# Altium PCB TIDA-010967_PCB.PcbDoc (part 5 of 5)
Units mil, origin at the board's own origin, x right, y up, seen from the top; angles counter-clockwise.
Board outline 2322.7 x 960 mil, 2 copper layers (Top Layer, Bottom Layer), stack 44.731 mil thick; 178 components, 80 nets, 496 pads, 399 vias.
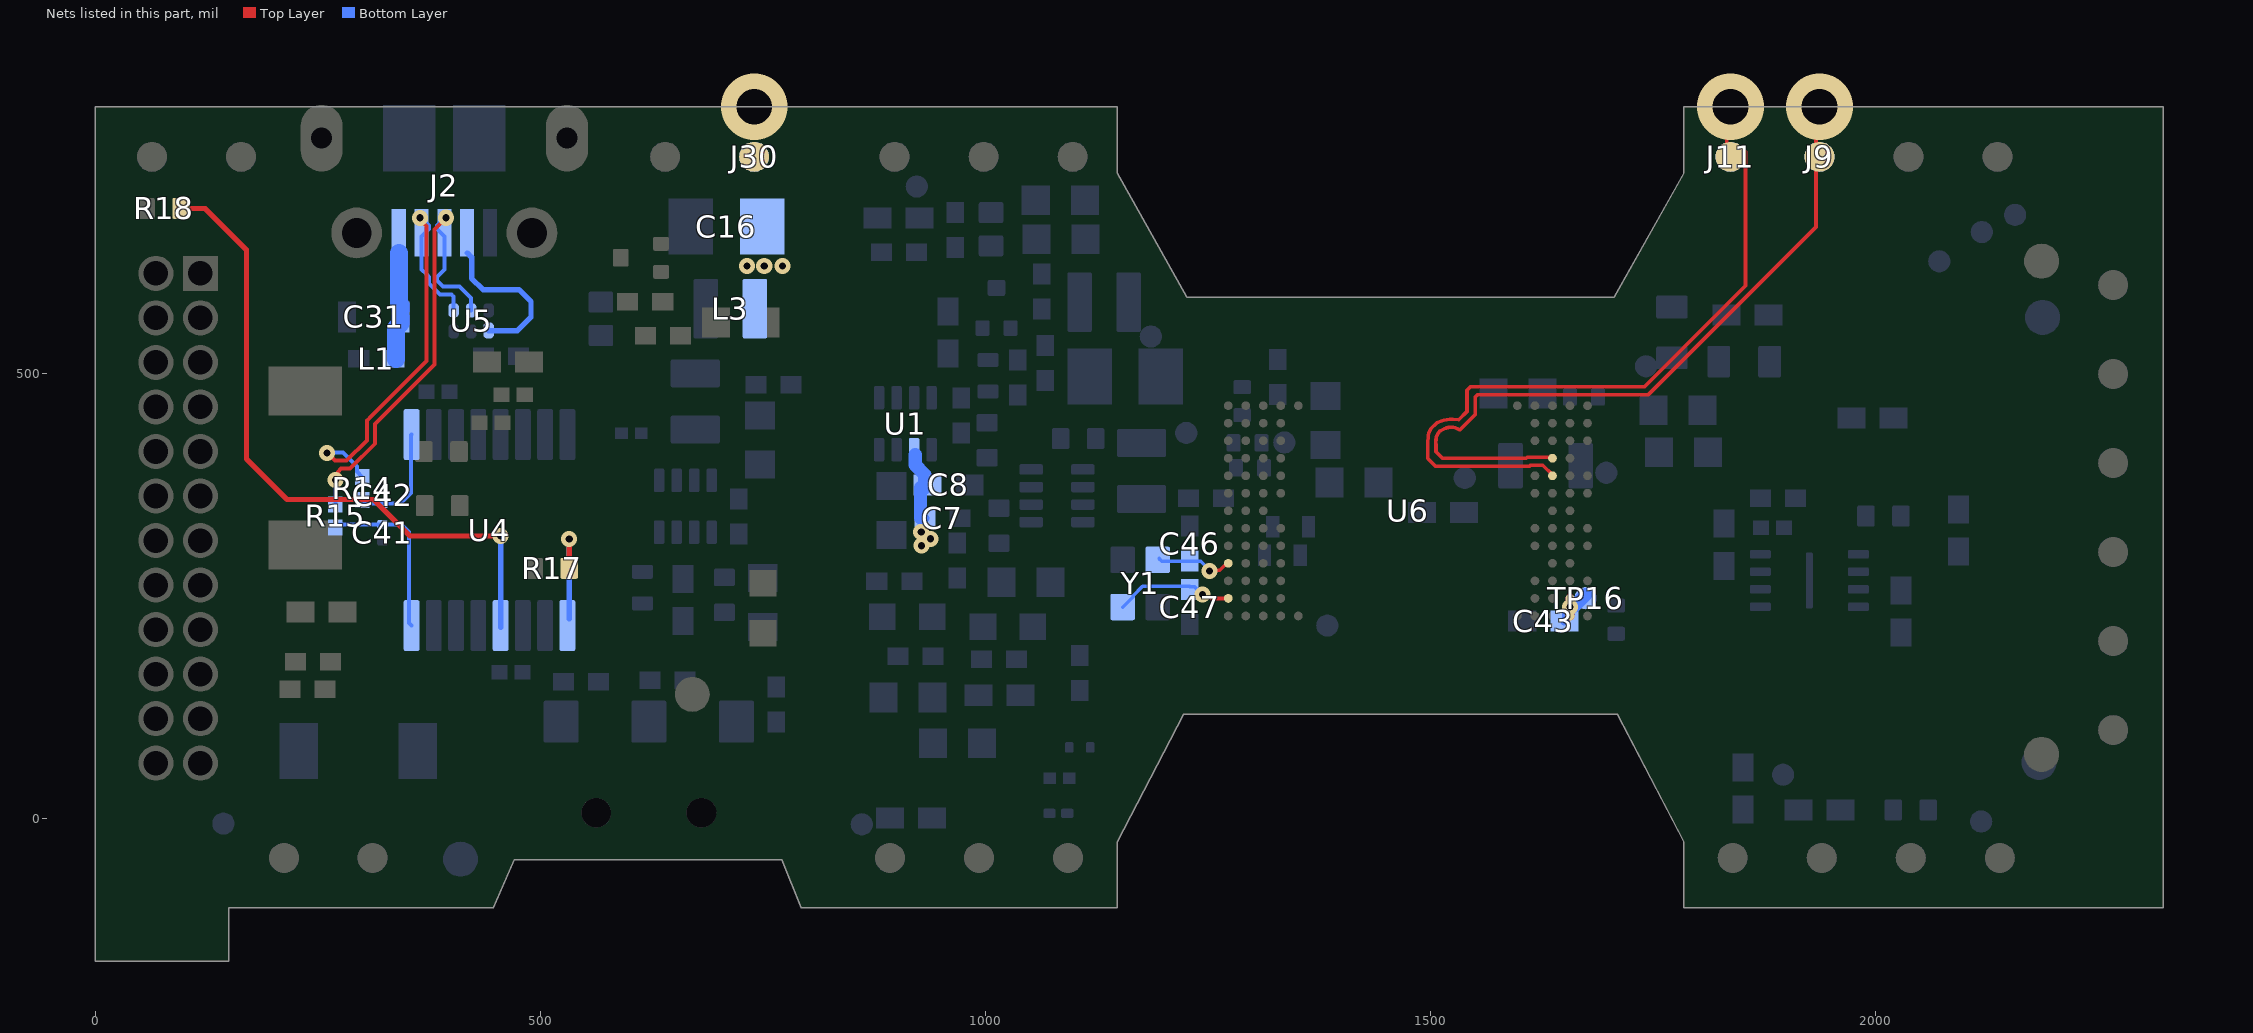
[diagram p3: the nets of this part, all layers, seen from the top]

## Via types
v1: diameter 18, hole 8, Top Layer to Bottom Layer, tented both sides, 370 vias
v2: diameter 75, hole 40, Top Layer to Bottom Layer, 26 vias
v3: diameter 118.11, hole 118.11, Top Layer to Bottom Layer, tented both sides, 3 vias

## Nets (pads, with @x,y where several pads share a name; then routed paths per layer and width w, separated by ;. In a path a pad name is that pad's centre, name@x,y a point inside that pad or via, vN(x,y) a via of type N, cw(c..) or ccw(c..) an arc to the next point about the centre after c; other vN are vias at no path point) (continued)
UART_RX: R18.2 U4.4 | length 751.9
  Top Layer w6: R18.2@96.28,685.75 123.3,685.75 169.77,639.28 169.77,404.28 215.3,358.76 312.41,358.76 353.34,317.83 v1(455.27,317.83)
  Bottom Layer w6: U4.4@455.22,215.01 455.22,317.79 v1(455.27,317.83)
UART_TX: R17.2 U4.1 | length 127.5
  Top Layer w6: R17.2@532.28,281.48 v1(532.28,314.31)
  Bottom Layer w6: v1@530.47,310.91 v1@532.28,312.72 ; U4.1@532.28,224.8 v1@532.28,312.72 ; v1(532.28,314.31) v1@532.28,312.72 ; v1@534.15,314.59 v1@532.28,312.72
UARTA_RX: J11.1 U6.J3 | length 823.4
  Top Layer w4: U6.J3@1636.7,385.49 1636.7,386.44 1625.73,397.41 1612.08,397.41 1610.97,396.3 1505.25,396.3 1496.65,404.9 1496.65,418.75 1496.66,422.97 cw(c1522.66,422.94) 1497,427.16 1497.29,429.55 1497.29,431.02 1497.73,433.18 1500.04,438.15 1506.71,444.82 1512.87,447.12 1514.85,447.74 cw(c1522.66,422.94) 1524.43,448.88 1531.56,448.39 1540.75,457.58 1540.75,481.55 1544.86,485.67 1740.26,485.67 1853.55,598.95 1853.55,749.18 1853.44,749.28 ; J11.1@1832.7,743.75 v2@1832.7,800
  other v2: 1836.65,800
UARTA_TX: J9.1 U6.K3 | length 825.4
  Top Layer w4: U6.K3@1636.27,405.12 1635.1,406.29 1631.56,406.29 1631.44,406.41 1608.35,406.41 1607.24,405.3 1513.17,405.3 1507.08,411.39 1505.91,412.56 1505.91,420 cw(c1522.66,422.94) 1505.91,425.87 1506.29,429.01 1508.43,433.58 1509.04,434.42 1510.44,435.82 1515.01,438.12 cw(c1522.66,422.94) 1532.15,437.04 1532.58,437.04 1532.94,437.05 1549.75,453.85 1549.75,473.68 1552.73,476.67 1744.5,476.67 1932.74,664.9 1932.74,743.75 1932.74,796.09 v2(1936.65,800)
USB_5V: C31.2 J2.1 L1.1 | length 117.3
  Bottom Layer w15: L1.1@335.25,516.74 L1.1@337.06,518.55
  Bottom Layer w20: L1.1@337.74,516.29 337.74,551.37 342.8,556.43 C31.2@342.8,563.93 ; J2.1@341.05,635.69 341.05,579.04 342.8,577.29 C31.2@342.8,571.43
USB_DM: J2.2 R14.1 U5.4 | length 527.7
  Top Layer w4.5: v1(260.3,411.23) 269.14,402.39 282.29,402.39 305.06,425.16 305.06,447.27 310.33,452.54 371.92,514.13 371.92,666.05 364.83,673.14 v1(364.83,675.22)
  Bottom Layer w4.5: v1(260.3,411.23) 260.71,411.64 278.3,411.64 293.82,396.12 293.82,390.12 R14.1@299.76,384.18 ; v1(364.83,675.22) 366.14,675.22 374.93,666.42 374.93,662.69 366.64,654.4 366.64,616.99 372.26,611.37 374.93,608.73 374.93,601.28 387.03,589.18 399.8,589.18 402.43,586.55 U5.4@402.43,571.28
USB_DP: J2.3 R15.1 U5.5 | length 521.6
  Top Layer w4.5: v1(269.92,380.89) 272.5,383.47 272.5,389.93 275.96,393.39 286.02,393.39 314.06,421.43 314.06,443.54 380.92,510.4 380.92,662.12 v1(394.05,675.27)
  Bottom Layer w4.5: R15.1@269.37,353.37 269.92,353.92 v1(269.92,380.89) ; v1(394.05,675.27) 392.79,675.27 383.93,666.42 383.93,662.69 392.23,654.4 392.23,635.69 392.23,616.99 386.6,611.37 383.93,608.73 383.93,605.01 390.76,598.18 403.53,598.18 403.6,598.11 408.8,598.11 421.78,585.13 421.78,571.62 U5.5@422.12,571.28
USB_ID: J2.4 U5.1 | length 179.5
  Bottom Layer w6: J2.4@417.82,635.69 422.69,630.82 422.69,607.22 435.41,594.5 475.94,594.5 489.4,581.04 489.4,563.6 474.29,548.49 U5.1@441.66,548.49
USB_INPUT_3V3: C7.1 C8.2 C16.1 J30.1 L3.2 U1.6 | length 79.1
  Bottom Layer w10: C7.1@929,340.58 C7.1@931.83,337.76
  Bottom Layer w15: U1.6@920.94,409.06 920.94,397.52 931.82,386.65 C8.2@931.82,372.19 ; C7.1@926.81,338.48 C8.2@926.81,372.19
  other v1: 927.83,306.91 938.28,314.7 927.69,322.19 732.02,621.26 751.37,621.26 771.92,621.02
  other v2: 740.07,800
USBDM: C42.2 R14.2 U4.9 | length 124.1
  Bottom Layer w4.5: R14.2@301.23,354.52 301.46,354.29 316.88,354.29 342.61,354.29 354.67,366.35 354.67,431.16 U4.9@355.24,431.73
USBDP: C41.2 R15.2 U4.8 | length 193.4
  Bottom Layer w4.5: R15.2@268.94,330.46 269.39,330.91 343.64,330.91 352.26,322.29 352.26,220.14 U4.8@355.24,217.16
VPP_1P7: C43.1 TP16.1 U6.A2 U6.B2 | length 55
  Top Layer w10: U6.A2@1656.39,228.01 U6.B2@1656.39,247.7
  Bottom Layer w10: C43.1@1650.04,222.13 1652.21,224.29 v1@1652.21,236.65
  Bottom Layer w15: v1@1659.85,238.02 TP16.1@1673.91,252.09
  other v1: 1656.45,238.02
XTALM: C47.2 U6.B10 Y1.1 | length 124.9
  Top Layer w4: v1@1251.82,249.38 1253.59,247.62 U6.B10@1272.35,247.62
  Bottom Layer w4: Y1.1@1153.95,237.93 1165.73,249.71 1165.73,250.86 1176.26,261.4 C47.2@1229.39,261.4 ; C47.2@1229.39,260.93 1234.67,260.93 v1(1243.54,252.06)
XTALP: C46.2 U6.D10 Y1.3 | length 88.3
  Top Layer w4: v1@1251,279.05 1251.25,279.3 1263.07,279.3 1271.01,287.24 U6.D10@1272.59,287.24
  Bottom Layer w4: Y1.3@1194.84,292.6 1197.97,289.47 1241.76,289.47 1251.42,279.81 v1(1251.42,278.38)
pads on no net: FID1.1 FID2.1 FID3.1 FID4.1 FID5.1 FID6.1 J1.5 J1.6 J1.7 J1.8 J1.10 J1.13 J1.14 J1.16 SW1. U4.2 U4.6 U4.7 U4.14 U4.15 U4.16 U6.L3 U6.L4
copper on no net:
  other v3: 75.87,-88.15 2251.57,-27.28 2251.07,726.6

## Polygon pours and split planes (outlines as drawn)
RADAR_1V2 on Bottom Layer "RADAR_1V2_L02_P039" (solid, remove dead copper, pour order 39): 1664.37,427.66 1697.77,427.66 1723.65,427.66 1723.65,413.87 1713.96,404.19 1713.96,370.84 1652.34,370.84 1652.34,420.62
REG_3V3 on Bottom Layer "REG_3V3_L02_P033" (solid, remove dead copper, pour order 33): 904.81,277.66 904.81,257.51 923.51,238.8 923.51,66.76 960.5,66.76 960.5,103.72 976.09,121.77 1013.61,121.98 1013.61,168.41 1013.61,217.62 1017.87,221.87 1017.87,259.62 1035.08,276.82 1035.08,301.5 1065.88,301.5 1065.88,340.97 999.28,340.97 999.28,324.45 952.48,277.66
SW3_3V3 on Bottom Layer "SW3_3V3_L02_P044" (solid, remove dead copper, pour order 44): 643.65,455.15 702.69,455.15 702.69,419.41 692.56,419.41 678.9,405.75 678.9,366.52 665.96,366.52 665.96,405.49 652.04,419.41 643.74,419.41
RADAR_1V8 on Bottom Layer "RADAR_1V8_L02_P041" (solid, remove dead copper, pour order 41): 1356.54,488.31 1317.87,488.31 1317.87,467.23 1277.53,467.23 1277.53,443.63 1347.92,443.63 1356.72,452.43
GND on Bottom Layer "GND_L02_P061" (solid, remove dead copper, pour order 61): -7.41,800 -7.41,-160 2315.29,-160 2315.29,800
USB_INPUT_3V3 on Bottom Layer "USB_INPUT_3V3_L02_P058" (solid, remove dead copper, pour order 58): 917.62,388.33 917.62,303.4 923.44,297.58 949.01,297.58 949.01,388.33
REG_1V8 on Bottom Layer "REG_1V8_L02_P057" (solid, remove dead copper, pour order 57): 1146.03,616.54 1145.78,616.29 1145.78,543.21 1146.78,543.21 1169.47,520.51 1169.47,465.64 1225.85,465.64 1225.85,532.48 1212.91,532.48 1193.17,552.23 1193.17,560.79 1175.96,578 1175.96,616.29
REG_OUT_1V8 on Bottom Layer "REG_OUT_1V8_L02_P055" (solid, remove dead copper, pour order 55): 1090.32,667.74 1091.63,666.43 1091.63,545.6 1125.97,545.6 1130.43,550.05 1130.43,668
REG_OUT_1V8 on Bottom Layer "REG_OUT_1V8_L02_P054" (solid, remove dead copper, pour order 54): 1112.86,445.86 1112.86,406.14 1203.76,406.14 1204.2,406.59 1204.05,406.74 1204.05,446.01
DC_OUT_3V3 on Bottom Layer "DC_OUT_3V3_L02_P045" (solid, remove dead copper, pour order 45): 673.34,608.75 708.65,608.75 708.65,532.93 763.79,477.79 763.79,432.56 724.94,432.56 724.94,451.57 701.6,474.91 642.9,474.91 642.9,578.31
5V_IN_USB on Bottom Layer "5V_IN_USB_L02_P043" (solid, remove dead copper, pour order 43): 736.55,335.44 686.1,335.48 686.1,305.78 719.48,305.78 730,295.26 730,265.43 712.75,248.18 693.24,248.18 693.24,224.84 694.04,224.04 718.81,224.04 718.81,226.28 739.2,246.67 767.88,246.67 767.88,307.08
NetD1_2 on Bottom Layer "NETD1_2_L02_P052" (solid, remove dead copper, pour order 52): 192.27,526.97 311.02,526.97 311.02,497.52 191.97,497.52
USB_INPUT_3V3 on Bottom Layer "USB_INPUT_3V3_L02_P046" (solid, remove dead copper, pour order 46): 723.31,752.95 723.31,534.79 768.85,534.79 782.08,548.02 782.08,752.23
RADAR_1P2_RF on Bottom Layer "RADAR_1P2_RF_L02_P031" (solid, remove dead copper, pour order 31): 1302.05,438.29 1399.72,438.29 1399.72,403.58 1357.84,403.58 1349.45,411.97 1302.19,411.97
RADAR_1V_RF_OUT on Bottom Layer "RADAR_1V_RF_OUT_L02_P032" (solid, remove dead copper, pour order 32): 1305.23,404.9 1305.62,404.51 1349.32,404.51 1359.13,394.69 1400.25,394.69 1400.25,360.47 1363.84,360.47 1340.07,384.24 1305.42,384.24
RADAR_SRAM_1V2 on Bottom Layer "RADAR_SRAM_1V2_L02_P038" (solid, remove dead copper, pour order 38): 1666.18,494.66 1596.91,494.66 1596.91,456.88 1636.7,456.88 1636.7,444.17 1666.55,444.17
SW3_1V8 on Bottom Layer "SW3_1V8_L02_P034" (solid, remove dead copper, pour order 34): 1095.35,359.82 1095.35,345.85 1143.77,345.85 1147.96,341.66 1205.92,341.66 1205.92,375.92 1205.05,376.78 1142.61,376.78 1125.77,359.95
5V_IN_USB on Bottom Layer "5V_IN_USB_L02_P028" (solid, remove dead copper, pour order 28): 193.18,-45.67 252.18,-45.67 252.18,153.48 252.18,209.9 193.18,209.9
USB_INPUT_3V3 on Top Layer "USB_INPUT_3V3_L01_P049" (solid, remove dead copper, pour order 49): 721.81,632.03 855.98,632.03 878.57,609.44 878.57,429.5 947.48,360.6 947.48,296.98 915.56,296.98 915.56,332.21 848.32,399.45 848.32,415.17 832.22,432.14 831.87,464.05 845.23,479.12 845.23,602.32 721.81,602.92
5V_IN_USB on Top Layer "5V_IN_USB_L01_P042" (solid, remove dead copper, pour order 42): 233.71,150.17 233.79,150.1 233.79,126.72 519.92,126.72 703.07,309.87 771.2,309.87 771.2,245.48 694.18,245.48 548.84,100.14 192.4,100.14 192.4,154.19
GND on Top Layer "GND_L01_P063" (solid, remove dead copper, pour order 63): 1598,469.39 1597.76,469.15 1558.07,469.15 1558.07,451.58 1558.07,425 1589.1,425 1589.7,424.4 1601.01,435.71 1601.01,469.27 1601.49,469.75
GND on Top Layer "GND_L01_P060" (solid, remove dead copper, pour order 60): 0,800 0,-160 2322.7,-160 2322.7,800
NetD1_2 on Top Layer "NETD1_2_L01_P053" (solid, remove dead copper, pour order 53): 192.12,528.15 281.04,528.15 281.04,452.91 191.46,452.91
REG_OUT_1V8 on Top Layer "REG_OUT_1V8_L01_P056" (solid, remove dead copper, pour order 56): 1125.82,405.53 1154.54,405.53 1154.54,529.88 1128.85,555.56 1128.85,632.62 1092.16,632.62 1092.94,631.83 1092.94,534.94 1126.85,501.04
DC_OUT_3V3 on Top Layer "DC_OUT_3V3_L01_P050" (solid, remove dead copper, pour order 50): 715.26,575.16 715.26,510.03 643.41,510.03 643.41,551.13 667.44,575.16
5V_IN_USB on Top Layer "5V_IN_USB_L01_P029" (solid, remove dead copper, pour order 29): 191.82,331.69 191.82,220.19 191.82,105.06 236.91,105.06 237.19,105.35 237.19,180.21 251.51,194.53 251.51,246.4 285.68,280.57 285.68,331.12
RADAR_1V8 on Top Layer "RADAR_1V8_L01_P040" (solid, remove dead copper, pour order 40): 1264.21,474.23 1264.44,474 1264.44,456.58 1281.17,456.58 1281.51,456.92 1282.9,455.54 1282.9,438 1368.16,438 1368.16,474.11

## Keep-outs
Keep-Out Layer:
  text ".Layer_Name" at -1267.26,-2351.64 h60

## Other copper
Top Layer:
  text ".Layer_Name" at -1252.74,-2340.54 h60
Bottom Layer:
  pour cut-out: 1243.38,317.17 1239.29,313.08 1239.29,309.39 1246.08,309.39 1247.92,311.23 1247.92,315.34 1245.87,317.39
  text ".Layer_Name" at -1018.85,-2336.57 h60

## Silkscreen, mask and mechanical layers (free items; w line width, h text height)
Top Overlay:
  lines w10: 201.82,709.94 201.82,709.19 227.06,684.38
  text "RX   TX" at 1826,695.8 h18
  text "GND   3V3" at 611.39,690.75 h18
  text "3V3   GND  1V8" at 874.21,690.24 h18
  text "GPIO5  TCK" at 1993.97,682.42 h18
  text "TX RX" at 243.34,675.58 h18
  text "UARTA" at 1846.58,668.13 h18
  text "USB" at 719.63,661.86 h18
  text "TMS" at 2208.15,579.77 h18 r270
  text "GPIO2" at 2177.66,547.74 h18 r270
  text "SPI CS" at 2206.03,464.81 h18 r270
  text "I2C SDA" at 2177.66,451.19 h18 r270
  text "TEXAS" at 975.77,436.89 h20
  text "INSTRUMENTS" at 917.6,402.96 h20
  text "CLK" at 2209.22,324.65 h18 r270
  text "SCL" at 2177.34,319.13 h18 r270
  text "MOSI" at 2208.51,249.78 h18 r270
  text "MISO" at 2208.51,177.39 h18 r270
  text "For evaluation only;" at 1794.17,171.38 h35
  text "not FCC approved" at 1794.45,133.28 h35
  text "for resale." at 1792.61,96.14 h35
  text "TIDA-010967 Rev.B" at 1790.8,53.2 h40
  text "TDO" at 2009.56,15.69 h18
  text "REG" at 862.45,14 h18
  text "TX    RX  SOP0" at 1819.77,-9.19 h18
  text "5VDC  GND" at 178.77,-9.66 h18
  text "TDI" at 2116.52,-9.83 h18
  text "MODE  GND  NRST" at 862.04,-12.46 h18
  text ".Layer_Name" at -1264.57,-2344.88 h60
Bottom Overlay:
  lines w10: 604.88,307.14 604.88,306.95 614.44,297.39 626.93,297.39 ; 1186.01,583.92 1186.75,583.92 ; 1186.38,583.92 1220.65,549.64 1221.77,549.64 ; 1221.21,549.64 1230.84,549.46 ; 1589.25,443.79 1623.62,443.79
  text "FUNC" at 856.68,68.4 h23
  text "MODE" at 856.82,40.64 h23
  text "FLASHING MODE" at 465.67,4.19 h23
  text ".Layer_Name" at -1018.85,-2336.57 h25
Top Paste:
  text ".Layer_Name" at -1264.57,-2344.88 h60
Bottom Paste:
  text ".Layer_Name" at -1018.85,-2336.57 h60
Top Solder:
  text ".Layer_Name" at -1264.57,-2344.88 h60
  text ".Layer_Name" at -1264.57,-2344.88 h60
Bottom Solder:
  text ".Layer_Name" at -1018.85,-2336.57 h60
Drill Guide:
  text ".Layer_Name" at -1267.26,-2351.64 h60
M1 Board Outline:
  circle w2: c75.83,-88.16 r59.06
  circle w2: c2251.57,-27.15 r59.06
  circle w2: c2251.06,726.6 r59.06
  lines w2: 470.38,-45.81 771.2,-45.81 ; 470.42,-45.84 447,-100 150,-100 150,-160 0,-160 0,800 1147.72,800 1147.73,725.77 1225.82,586 1705.96,586 1784.42,725.77 1784.42,800 2322.7,800 2322.7,-100 1784.42,-100 1784.42,-25.77 1709.51,117.74 1222.67,117.74 1147.73,-25.77 1147.72,-100 793,-100 770.94,-45.67 ; 811.59,202.07 811.59,224.33 834.61,224.33 ; 811.64,202.02 834.66,202.02 ; 812.14,784.22 812.14,767.57 836.23,767.57 836.23,784.24 812.16,784.24 ; 834.66,202.17 834.66,224.29 ; 833,-85.22 833,-45.86 812.11,-45.86 812.11,-85.21 812.13,-85.23 833,-85.23 ; 833,-85.23 833,-85.23 ; 787.23,357.01 834.15,357.01 834.15,400.92 787.23,400.92 787.23,357.01 ; 810.44,486.64 834.74,486.64 834.74,516.84 810.44,516.84 810.44,486.64 ; 810.63,276.77 834.14,276.77 834.14,294.1 810.63,294.1 810.63,276.77 ; 811.87,574.1 835.25,574.1 835.25,589.41 811.9,589.41 811.87,574.1 ; 812.13,719.77 836.79,719.77 836.79,736.24 812.11,736.24 812.13,719.77 ; 814.24,9.72 830.96,9.72 830.96,23.86 814.24,23.86 814.24,9.72
  text ".Layer_Name" at -1273.87,-2274.95 h40
M3 3D STEP Top:
  lines w0.5: 685.19,-354.85 685.19,1023.11 ; 685.19,-354.85 724.56,-354.85 ; 685.19,-354.85 724.56,-354.85 ; 685.19,-354.85 685.19,-453.27 2161.56,-453.27 ; 685.19,1023.11 685.19,1160.9 2161.56,1160.9 ; 685.19,1023.11 724.56,1023.11 ; 685.19,1023.11 724.56,1023.11 ; 724.56,-354.85 ccw(c783.61,-354.85) 842.67,-354.85 ; 724.56,-354.85 cw(c783.61,-354.85) 825.37,-313.09 ; 724.56,-354.85 cw(c783.61,-354.85) 825.37,-313.09 ; 724.56,-354.85 ccw(c783.61,-354.85) 842.67,-354.85 ; 724.56,1023.11 ccw(c783.61,1023.11) 842.67,1023.11 ; 724.56,1023.11 cw(c783.61,1023.11) 842.67,1023.11 ; 724.56,1023.11 cw(c783.61,1023.11) 842.67,1023.11 ; 724.56,1023.11 ccw(c783.61,1023.11) 842.67,1023.11 ; 825.37,-313.09 cw(c783.61,-354.85) 842.67,-354.85 ; 825.37,-313.09 cw(c783.61,-354.85) 842.67,-354.85 ; 825.37,-313.09 882.04,-256.42 ; 825.37,-313.09 882.04,-256.42 ; 882.04,-256.42 882.04,924.68 2063.14,924.68 2063.14,-256.42 882.04,-256.42 ; 1452.59,314.13 1452.59,316.63 ; 1452.59,314.13 1490.09,314.13 ; 1452.59,314.13 1452.59,316.63 ; 1452.59,314.13 1490.09,314.13 ; 1452.59,316.63 1452.59,351.63 ; 1452.59,316.63 1453.59,316.63 ; 1452.59,316.63 1453.59,316.63 ; 1452.59,316.63 1452.59,351.63 ; 1452.59,316.63 1453.59,316.63 ; 1452.59,316.63 1453.59,316.63 ; 1452.59,351.63 1452.59,355.13 ; 1452.59,351.63 1453.59,351.63 ; 1452.59,351.63 1453.59,351.63 ; 1452.59,351.63 1452.59,355.13 ; 1452.59,351.63 1453.59,351.63 ; 1452.59,351.63 1453.59,351.63 ; 1452.59,355.13 1490.09,355.13 ; 1452.59,355.13 1490.09,355.13 ; 1453.59,316.63 cw(c1455.09,316.63) 1456.15,317.69 ; 1453.59,316.63 ccw(c1455.09,316.63) 1456.59,316.63 ; 1453.59,316.63 cw(c1455.09,316.63) 1456.15,317.69 ; 1453.59,316.63 ccw(c1455.09,316.63) 1456.59,316.63 ; 1453.59,351.63 cw(c1455.09,351.63) 1456.59,351.63 ; 1453.59,351.63 ccw(c1455.09,351.63) 1456.59,351.63 ; 1453.59,351.63 cw(c1455.09,351.63) 1456.59,351.63 ; 1453.59,351.63 ccw(c1455.09,351.63) 1456.59,351.63 ; 1456.15,317.69 cw(c1455.09,316.63) 1456.59,316.63 ; 1456.15,317.69 cw(c1455.09,316.63) 1456.59,316.63 ; 1456.15,317.69 1457.59,319.13 ; 1456.15,317.69 1457.59,319.13 ; 1456.15,317.69 1457.59,319.13 ; 1456.15,317.69 1457.59,319.13 ; 1457.59,319.13 1457.59,349.13 ; 1457.59,319.13 1487.59,319.13 ; 1457.59,319.13 1457.59,349.13 ; 1457.59,319.13 1487.59,319.13 ; 1457.59,349.13 1487.59,349.13 ; 1457.59,349.13 1487.59,349.13 ; 1487.59,319.13 1487.59,349.13 ; 1487.59,319.13 1487.59,349.13 ; 1490.09,314.13 1490.09,315.13 ; 1490.09,314.13 1490.09,315.13 ; 1490.09,314.13 1493.59,314.13 ; 1490.09,314.13 1490.09,315.13 ; 1490.09,314.13 1490.09,315.13 ; 1490.09,314.13 1493.59,314.13 ; 1490.09,315.13 cw(c1490.09,316.63) 1491.59,316.63 ; 1490.09,315.13 ccw(c1490.09,316.63) 1491.59,316.63 ; 1490.09,315.13 cw(c1490.09,316.63) 1491.59,316.63 ; 1490.09,315.13 ccw(c1490.09,316.63) 1491.59,316.63 ; 1490.09,353.13 cw(c1490.09,351.63) 1491.59,351.63 ; 1490.09,353.13 ccw(c1490.09,351.63) 1491.59,351.63 ; 1490.09,353.13 cw(c1490.09,351.63) 1491.59,351.63 ; 1490.09,353.13 ccw(c1490.09,351.63) 1491.59,351.63 ; 1490.09,353.13 1490.09,355.13 ; 1490.09,353.13 1490.09,355.13 ; 1490.09,353.13 1490.09,355.13 ; 1490.09,353.13 1490.09,355.13 ; 1490.09,355.13 1493.59,355.13 ; 1490.09,355.13 1493.59,355.13 ; 1493.59,314.13 1493.59,355.13 ; 1493.59,314.13 1493.59,355.13 ; 2161.56,-453.27 2161.56,-413.9 ; 2161.56,-453.27 2161.56,-413.9 ; 2161.56,-453.27 2299.36,-453.27 2299.36,1160.9 2161.56,1160.9 ; 2161.56,-413.9 ccw(c2161.56,-354.85) 2220.62,-354.85 ; 2161.56,-413.9 cw(c2161.56,-354.85) 2220.62,-354.85 ; 2161.56,-413.9 cw(c2161.56,-354.85) 2220.62,-354.85 ; 2161.56,-413.9 ccw(c2161.56,-354.85) 2220.62,-354.85 ; 2161.56,1082.16 ccw(c2161.56,1023.11) 2220.62,1023.11 ; 2161.56,1082.16 cw(c2161.56,1023.11) 2220.62,1023.11 ; 2161.56,1082.16 cw(c2161.56,1023.11) 2220.62,1023.11 ; 2161.56,1082.16 ccw(c2161.56,1023.11) 2220.62,1023.11 ; 2161.56,1082.16 2161.56,1160.9 ; 2161.56,1082.16 2161.56,1160.9
  text ".Layer_Name" at -1267.26,-2351.64 h60
M4 3D STEP Bottom:
  lines w0.5: 583.6,-328.9 583.6,-427.32 2059.98,-427.32 ; 583.6,-328.9 622.97,-328.9 ; 583.6,-328.9 622.97,-328.9 ; 583.6,-328.9 583.6,1049.06 ; 583.6,1049.06 622.97,1049.06 ; 583.6,1049.06 622.97,1049.06 ; 583.6,1049.06 583.6,1186.85 2059.98,1186.85 ; 622.97,-328.9 ccw(c682.03,-328.9) 741.08,-328.9 ccw(c682.03,-328.9) 723.78,-287.14 ; 622.97,-328.9 cw(c682.03,-328.9) 723.78,-287.14 ; 622.97,1049.06 ccw(c682.03,1049.06) 741.08,1049.06 ccw(c682.03,1049.06) 622.97,1049.06 ; 723.78,-287.14 780.45,-230.47 ; 723.78,-287.14 780.45,-230.47 ; 780.45,-230.47 1961.55,-230.47 1961.55,950.63 780.45,950.63 780.45,-230.47 ; 1351,340.08 1388.5,340.08 ; 1351,340.08 1351,342.58 ; 1351,340.08 1388.5,340.08 ; 1351,340.08 1351,342.58 ; 1351,342.58 1352,342.58 ; 1351,342.58 1352,342.58 ; 1351,342.58 1351,377.58 ; 1351,342.58 1352,342.58 ; 1351,342.58 1352,342.58 ; 1351,342.58 1351,377.58 ; 1351,377.58 1352,377.58 ; 1351,377.58 1352,377.58 ; 1351,377.58 1351,381.08 ; 1351,377.58 1352,377.58 ; 1351,377.58 1352,377.58 ; 1351,377.58 1351,381.08 ; 1351,381.08 1388.5,381.08 ; 1351,381.08 1388.5,381.08 ; 1352,342.58 ccw(c1353.5,342.58) 1355,342.58 ; 1352,342.58 cw(c1353.5,342.58) 1354.56,343.64 ; 1352,342.58 ccw(c1353.5,342.58) 1355,342.58 ; 1352,342.58 cw(c1353.5,342.58) 1354.56,343.64 ; 1352,377.58 ccw(c1353.5,377.58) 1355,377.58 ; 1352,377.58 cw(c1353.5,377.58) 1355,377.58 ; 1352,377.58 ccw(c1353.5,377.58) 1355,377.58 ; 1352,377.58 cw(c1353.5,377.58) 1355,377.58 ; 1354.56,343.64 cw(c1353.5,342.58) 1355,342.58 ; 1354.56,343.64 cw(c1353.5,342.58) 1355,342.58 ; 1354.56,343.64 1356,345.08 ; 1354.56,343.64 1356,345.08 ; 1354.56,343.64 1356,345.08 ; 1354.56,343.64 1356,345.08 ; 1356,345.08 1386,345.08 ; 1356,345.08 1356,375.08 ; 1356,345.08 1386,345.08 ; 1356,345.08 1356,375.08 ; 1356,375.08 1386,375.08 ; 1356,375.08 1386,375.08 ; 1386,345.08 1386,375.08 ; 1386,345.08 1386,375.08 ; 1388.5,340.08 1392,340.08 ; 1388.5,340.08 1388.5,341.08 ; 1388.5,340.08 1388.5,341.08 ; 1388.5,340.08 1392,340.08 ; 1388.5,340.08 1388.5,341.08 ; 1388.5,340.08 1388.5,341.08 ; 1388.5,341.08 ccw(c1388.5,342.58) 1390,342.58 ; 1388.5,341.08 cw(c1388.5,342.58) 1390,342.58 ; 1388.5,341.08 ccw(c1388.5,342.58) 1390,342.58 ; 1388.5,341.08 cw(c1388.5,342.58) 1390,342.58 ; 1388.5,379.08 ccw(c1388.5,377.58) 1390,377.58 ; 1388.5,379.08 cw(c1388.5,377.58) 1390,377.58 ; 1388.5,379.08 ccw(c1388.5,377.58) 1390,377.58 ; 1388.5,379.08 cw(c1388.5,377.58) 1390,377.58 ; 1388.5,379.08 1388.5,381.08 ; 1388.5,379.08 1388.5,381.08 ; 1388.5,379.08 1388.5,381.08 ; 1388.5,379.08 1388.5,381.08 ; 1388.5,381.08 1392,381.08 ; 1388.5,381.08 1392,381.08 ; 1392,340.08 1392,381.08 ; 1392,340.08 1392,381.08 ; 2059.98,-427.32 2197.77,-427.32 2197.77,1186.85 2059.98,1186.85 ; 2059.98,-427.32 2059.98,-387.95 ; 2059.98,-427.32 2059.98,-387.95 ; 2059.98,-387.95 ccw(c2059.98,-328.9) 2119.03,-328.9 ccw(c2059.98,-328.9) 2059.98,-387.95 ; 2059.98,1108.11 ccw(c2059.98,1049.06) 2119.03,1049.06 ccw(c2059.98,1049.06) 2059.98,1108.11 ; 2059.98,1108.11 2059.98,1186.85 ; 2059.98,1108.11 2059.98,1186.85
  text ".Layer_Name" at -1267.26,-2351.64 h60
M5 Assembly Top:
  lines w10: -2136.26,-2423.31 4463.74,-2423.31 ; -2136.26,-2219.98 4465.74,-2219.98 ; -2136.26,-2016.65 -2136.26,-2626.65 1868.74,-2626.65 4465.74,-2626.65 4465.74,-2016.65 -2135.76,-2016.65 -2135.76,-2626.65 -560.26,-2626.65 ; 328.74,-2626.65 328.74,-2016.65 ; 1595.74,-2219.98 1595.74,-2016.65 ; 2435.74,-2219.98 2435.74,-2016.65 ; 3057.74,-2633.15 3057.74,-2430.31
  text "COMPONENTS MARKED 'DNP' SHOULD NOT BE POPULATED." at -1037.74,2616.59 h60
  text "ASSEMBLY VARIANT:" at -1038.24,2501.09 h60
  text ".VariantName" at -2.24,2501.09 h60
  text "PCB VIEWED FROM TOP SIDE" at -2072.76,-2148.81 h60
  text "BOARD #:" at 403.74,-2148.81 h60
  text ".PRJ_Number" at 949.24,-2148.81 h60
  text "REV:" at 1793.74,-2148.81 h60
  text ".PCB_Rev" at 2085.24,-2148.81 h60
  text "SVN REV:" at 2631.74,-2148.81 h60
  text ".VersionControl_RevNumber" at 3137.74,-2148.81 h60
  text "Assembly Layer Top" at -1277.26,-2348.15 h60
  text "TID #:" at 403.74,-2352.15 h60
  text ".TID" at 949.24,-2352.15 h60
  text "PLOT NAME =" at -2072.76,-2557.48 h60
  text ".plot_File_Name" at -1267.26,-2557.48 h60
  text "GENERATED    :" at 405.74,-2557.48 h60
  text ".Print_Date" at 1275.24,-2557.48 h60
  text ".Print_Time" at 2004.24,-2557.48 h60
  text "TEXAS INSTRUMENTS" at 3268.74,-2557.48 h60
M6 Assembly Bottom:
  lines w10: -2136.76,-2220.48 4465.24,-2220.48 ; -2134.76,-2423.81 4465.24,-2423.81 ; -728.76,-2633.65 -728.76,-2430.81 ; -106.76,-2220.48 -106.76,-2017.15 ; 733.24,-2220.48 733.24,-2017.15 ; 2000.24,-2627.15 2000.24,-2017.15 ; 2889.24,-2627.15 4464.74,-2627.15 4464.74,-2017.15 -2136.76,-2017.15 -2136.76,-2627.15 460.24,-2627.15 4465.24,-2627.15 4465.24,-2017.15
  text "COMPONENTS MARKED 'DNP' SHOULD NOT BE POPULATED." at 4462.31,-1794.1 h60
  text ".VariantName" at 3418.31,-1910.1 h60
  text "ASSEMBLY VARIANT:" at 4457.31,-1910.1 h60
  text ".VersionControl_RevNumber" at -808.76,-2149.31 h60
  text "SVN REV:" at -302.76,-2149.31 h60
  text ".PCB_Rev" at 243.74,-2149.31 h60
  text "REV:" at 535.24,-2149.31 h60
  text ".PRJ_Number" at 1379.74,-2149.31 h60
  text "BOARD #:" at 1925.24,-2149.31 h60
  text "PCB VIEWED FROM BOTTOM SIDE" at 4401.74,-2149.31 h60
  text "Assembly Bottom Layer" at 4040.74,-2338.15 h60
  text ".TID" at 1379.74,-2352.65 h60
  text "TID #:" at 1925.24,-2352.65 h60
  text "TEXAS INSTRUMENTS" at -939.76,-2557.98 h60
  text ".Print_Time" at 324.74,-2557.98 h60
  text ".Print_Date" at 1053.74,-2557.98 h60
  text "GENERATED    :" at 1923.24,-2557.98 h60
  text ".plot_File_Name" at 3596.24,-2557.98 h60
  text "PLOT NAME =" at 4401.74,-2557.98 h60
M9 Title Sheet:
  lines w10: 164.24,-2826.65 164.24,-2626.65 ; 164.24,6473.35 164.24,6673.35 ; 2664.24,-2826.65 2664.24,-2626.65 ; 2664.24,6473.35 2664.24,6673.35
  text "1" at -1104.43,6543.35 h70
  text "2" at 1391.24,6543.35 h70
  text ".Layer_Name" at -1257.96,-2358.63 h60
  text "1" at -1104.43,-2756.65 h70
  text "2" at 1391.24,-2756.65 h70
M10 Fab Notes:
  drawing of 251 lines, arcs and shapes, not listed
  text "3" at 3880.58,6543.35 h70
  text "4" at 6387.25,6543.35 h70
  text "5" at 8886.24,6543.35 h70
  text "6" at 11391.24,6543.35 h70
  text "A" at -2260.76,5400.35 h70
  text "A" at 12539.24,5400.35 h70
  text "DESIGN INFORMATION" at 10537.75,4863.03 h60
  text "4.0" at 10932.23,4733.63 h60
  text "MIN. TRACK WIDTH:" at 9893.2,4730.9 h60
  text "MIL" at 11144.2,4730.9 h60
  text "4.0" at 10929.69,4614.25 h60
  text "MIN. CLEARANCE:" at 9893.2,4606.77 h60
  text "MIL" at 11144.2,4606.77 h60
  text "MIN. VIA PAD SIZE:" at 9893.2,4482.65 h60
  text "18" at 10915.88,4475.28 h60
  text "MIL" at 11166.74,4473.85 h60
  text "EXTERNAL" at 11414.34,4355.34 h60
  text "0.127mm (5.0MIL)" at 10588.2,4352.75 h60
  text "MINIMUM ANNULAR RING" at 9563.96,4344.53 h60
  text "PER" at 9763.96,4234.4 h60
  text "IPC-D-275 CLASS 2 LEVEL C" at 9983.96,4234.4 h60
  text "MIL, HOLES" at 11472.2,4133.92 h60
  text "+/-" at 11079.74,4125.34 h60
  text "+/-" at 11933.74,4125.34 h60
  text "REGISTRATION TOLERANCES:" at 9563.96,4124.27 h60
  text "METAL" at 10763.74,4124.27 h60
  text "5" at 11339.94,4124.27 h60
  text "3" at 12172.94,4124.27 h60
  text "MIL" at 12289.2,4124.27 h60
  text "HOLE SIZE TOLERANCE (UNLESS OTHERWISE SPECIFIED):" at 9563.96,4025.96 h60
  text "+/-" at 11933.74,4023.08 h60
  text "3" at 12172.94,4022.02 h60
  text "MIL" at 12289.2,4022.02 h60
  text "MATERIAL:" at 9489.2,3884.37 h60
  text "FR-4 High Tg" at 10475.64,3755.85 h60
  text "X" at 11217.74,3750.85 h60
  text "REFER STACK-UP" at 11718.59,3750.26 h55
  text "FR-408" at 9910.2,3743.34 h60
  text "OTHER" at 11398.2,3743.34 h60
  text "X" at 11388.74,3602.86 h60
  text "62 MIL (1.6mm) +/-10%" at 10230.3,3600.31 h60
  text "45.531 MIL +/-10%" at 11810.74,3593.85 h45
  text "THICKNESS:" at 9563.96,3592.09 h60
  text "OTHER" at 11515.2,3592.09 h60
  text "TOLERANCE:" at 9563.96,3453.78 h60
  text "X" at 10412.2,3453.78 h60
  text "ANSI IPC-6012 TYPE 3 CLASS 2" at 10590.21,3453.78 h60
  text "OTHER +/-" at 10590.2,3309.59 h60
  text "BOW & TWIST:" at 9563.96,3164.4 h60
  text "X" at 10412.2,3164.4 h60
  text "ANSI IPC-6012 TYPE 3 CLASS 2" at 10590.21,3164.4 h60
  text "B" at -2260.76,3020.35 h70
  text "B" at 12539.24,3020.35 h70
  text "OTHER +/-" at 10590.2,3017.7 h60
  text "DRILLING:" at 9489.2,2887.08 h60
  text "NC_DRILL FILES" at 11250.2,2781.89 h60
  text "REFERENCE:" at 9563.96,2777.96 h60
  text "X" at 10221.2,2777.86 h60
  text "AS SHOWN" at 10399.2,2777.96 h60
  text "X" at 11122.2,2777.96 h60
  text "OTHER" at 11548.2,2635.7 h60
  text "PTH COPPER THICKNESS:" at 9563.64,2632.18 h60
  text "X" at 10702.88,2632.18 h60
  text "20-30 um" at 10830.87,2632.18 h60
  text "NOTES:" at 2136.8,2578.1 h60
  text "BOARD FINISH:" at 9489.2,2484.58 h60
  text "1. BOARD SHALL MEET THE REQUIREMENTS OF UL-796E WITH FLAMMABILITY RATING OF MINIMUM 94V-0. UL LOGO," at 2163.55,2432.27 h60
  text "SILKSCREEN:" at 9644.42,2374.45 h60
  text "X" at 10602.2,2374.45 h60
  text "TOP" at 10719.2,2374.45 h60
  text "X" at 11112.2,2374.45 h60
  text "BOTTOM" at 11230.2,2374.45 h60
  text "MANUFACTURER'S IDENTIFICATION AND DATE CODE LETTER SHALL BE RENDERED IN SILKSCREEN." at 2270.28,2333.27 h60
  text "SILKSCREEN COLOR:" at 9644.42,2219.26 h60
  text "X" at 10601.2,2219.26 h60
  text "WHITE" at 10719.2,2219.26 h60
  text "OTHER" at 11230.2,2219.26 h60
  text "2. VENDOR MAY ADJUST SOLDERMASK WHEREVER SOLDERMASK PADS ARE THE SAME SIZE (1:1) AS PER THE MANUFACTURING CAPABILITIES" at 2156.57,2207.49 h60
  text "AND ALL OTHER SOLDER MASK PADS SHALL NOT BE MODIFIED, PROVIDED NO ADJACENT COPPER IS EXPOSED AND NO CONFLICT IS PRODUCED" at 2263.3,2108.49 h60
  text "GREEN" at 10850.2,2075.82 h60
  text "X" at 11319.37,2076.21 h60
  text "OTHER" at 11468.2,2075.82 h60
  text "RED" at 11840.74,2075.82 h60
  text "SOLDER RESIST COLOR:" at 9644.42,2068.95 h60
  text "WITH ANY STATED \"VIA TENTING/COVERING\" REQUIREMENTS." at 2263.3,2015.21 h60
  text "MATTE" at 10850.2,1921.56 h60
  text "SEMI-GLOSS" at 11467.74,1920.93 h60
  text "3. MANUFACTURER'S IDENTIFICATION,DATECODE LETTER SHALL BE SILKSCREENED ON SOLDER SIDE OF THE BOARD." at 2160.24,1897.11 h60
  text "4. TRACE WIDTH SHOULD BE ACCURATELY ETCHED. MAX TOLERANCE +/- 1 MIL." at 2155.29,1760.78 h60
  text "IMMERSION GOLD (ENIG)" at 10550.2,1748.79 h60
  text "ENEPIG" at 11887.74,1741.57 h60
  text "SURFACE FINISH:" at 9489.2,1740.57 h60
  text "X" at 10373.69,1737.09 h60
  text "5. LAYER TO LAYER REGISTRATION SHALL BE WITHIN +/-2 MIL." at 2162.35,1636.67 h60
  text "IMM. TIN/SILVER OR EQUIV" at 9818.74,1603.26 h60
  text "OTHER" at 11250.2,1599.32 h60
  text "6. REFER IMPEDANCE TABLE FOR IMPEDANCE CONTROL TRACES ON LAYER 1." at 2153.38,1515.8 h60
  text "ARRAY/PANEL:" at 9489.2,1443.94 h60
  text "CUT AND TRIM PER M1 BOARD OUTLINE" at 10550.2,1435.72 h60
  text "7. FOR ACCURACY OF THE ANTENNA DIMENSION, NEED TO BE MEASURE THE  ANTENNA DIMENSIONS ON ONE BOARD" at 2151.19,1364.04 h60
  text "N.C. ROUTE" at 10550.2,1299.75 h60
  text "V. SCORE" at 11416.2,1299.75 h60
  text "X" at 11233.19,1293.81 h60
  text "8. ALL VIAS ARE TENTED ON BOTH SIDES UNLESS OTHERWISE SOLDER MASK OPENED IN GERBER." at 2144.77,1251.36 h60
  text "CERTIFICATION:" at 9489.2,1170.63 h60
  text "MATERIALS AND WORKMANSHIP FOR ALL PCBS" at 10214.2,1170.63 h60
  text "9. VIA HOLE OFFSET SHALL BE WITHIN 1MILS OF ITS ORIGINAL LOCATION" at 2148.7,1135.75 h60
  text "TO MEET OR EXCEED THE REQUIREMENTS OF:" at 10214.2,1076.56 h60
  text "X" at 9851.7,947.93 h60
  text "ANSI IPC-A-600F CLASS ->" at 9979.7,947.93 h60
  text "X" at 11627.7,947.93 h60
  text "2" at 11737.7,947.93 h60
  text "1" at 11422.7,946.44 h60
  text "3" at 12091.7,946.44 h60
  text "X" at 10663.7,800.25 h60
  text "RoHS" at 10791.7,800.25 h60
  text "OTHER" at 11436.1,800.25 h60
  text "PER ORDER" at 11833.16,800.25 h60
  text "ALL BOARDS MUST MEET OR EXCEED UL94-V0 REQUIREMENTS." at 9516.74,646.42 h60
  text "C" at -2260.76,645.35 h70
  text "C" at 12539.24,645.35 h70
  text "PCB MUST BEAR THE UL94V-0 UL REGISTERED MATERIAL ID NUMBER" at 9516.74,530.36 h60
  text "ADDITIONAL REQUIREMENTS:" at 9489.2,360.93 h60
  text "MICROSECTION:" at 9563.96,253.81 h60
  text "YES" at 10469.7,253.81 h60
  text "REQUIRED" at 11331.2,109.47 h60
  text "BARE BOARD ELEC. TEST:" at 9563.96,106.62 h60
  text "NONE" at 10869.7,106.62 h60
  text "X" at 11213.2,106.62 h60
  text "PER ORDER" at 11923.2,106.62 h60
  text "XX MIL VIAS REQUIRE NON-CONDUCTIVE FILL AND PLANARIZE" at 9747.74,-39.15 h59
  text "XX MIL VIAS REQUIRE CONDUCTIVE FILL AND PLANARIZE" at 9738.74,-198.15 h60
  text "OUTER XX MIL TRACES REQUIRE 50 OHM SINGLE-ENDED IMPEDANCE" at 9733.88,-341.05 h58
  text "LAYER 1 & 6 (INNER LAYERS) XX MIL WIDE, XX MIL SPACE / TRACES REQUIRE 100 OHM DIFFERENTIAL IMPEDANCE" at 9772.74,-591.15 h60
  text "PROJECT TITLE:" at 9499.24,-1215.65 h45
  text ".PRJ_Title" at 9549.24,-1348.97 h70
  text "DESIGNED FOR:" at 9499.24,-1516.65 h45
  text ".PRJ_Customer" at 9549.24,-1656.65 h70
  text "D" at -2260.76,-1724.65 h70
  text "D" at 12539.24,-1724.65 h70
  text "FILE NAME:" at 9499.24,-1816.65 h45
  text ".PCB_File_Name_No_Path" at 9549.24,-1936.65 h70
  text "Texas Instruments (TI) and/or its licensors do not warrant the accuracy or completeness of this specification" at 4529.74,-2098.49 h45
  text "ENGINEER:" at 9499.24,-2106.65 h45
  text "LAYOUT BY:" at 11004.24,-2106.65 h45
  text "or any information contained therein. TI and/or its licensors do not warrant that this design will meet" at 4484.75,-2211.15 h45
  text ".PRJ_Engineer" at 9549.24,-2261.64 h70
  text ".PCB_Layout" at 11054.74,-2261.64 h70
  text "the specifications, will be suitable for your application or fit for any particular purpose, or will operate in" at 4484.75,-2323.82 h45
  text ".Layer_Name" at -1257.96,-2358.63 h60
  text "ALTIUM DESIGNER VERSION:" at 11004.24,-2416.65 h45
  text "an implementation. TI and/or its licensors do not warrant that the design is production worthy. You should" at 4484.75,-2436.48 h45
  text "completely validate and test your design implementation to confirm the system functionality for your application." at 4529.74,-2549.15 h45
  text ".print_Scale" at 9549.24,-2549.97 h70
  text ".Application_BuildNumber" at 11054.74,-2549.97 h70
  text "3" at 3880.58,-2756.65 h70
  text "4" at 6387.25,-2756.65 h70
  text "5" at 8886.24,-2756.65 h70
  text "6" at 11240.42,-2767 h70
M11 Gerber Information:
  lines w10: -2136.26,-2423.31 4463.74,-2423.31 ; -2136.26,-2219.98 4465.74,-2219.98 ; -2136.26,-2016.65 -2136.26,-2626.65 1868.74,-2626.65 4465.74,-2626.65 4465.74,-2016.65 -2135.76,-2016.65 -2135.76,-2626.65 -560.26,-2626.65 ; 328.74,-2626.65 328.74,-2016.65 ; 1595.74,-2219.98 1595.74,-2016.65 ; 2435.74,-2219.98 2435.74,-2016.65 ; 3057.74,-2633.15 3057.74,-2430.31
  text "ALL ARTWORK VIEWED FROM TOP SIDE" at -2072.76,-2148.81 h60
  text "BOARD #:" at 403.74,-2148.81 h60
  text ".PRJ_Number" at 949.24,-2148.81 h60
  text "REV:" at 1793.74,-2148.81 h60
  text ".PCB_Rev" at 2085.24,-2148.81 h60
  text "SVN REV:" at 2631.74,-2148.81 h60
  text ".VersionControl_RevNumber" at 3137.74,-2148.81 h60
  text "LAYER NAME =" at -2072.76,-2351.64 h60
  text "TID #:" at 403.74,-2352.15 h60
  text ".TID" at 949.24,-2352.15 h60
  text "PLOT NAME =" at -2072.76,-2557.48 h60
  text ".plot_File_Name" at -1267.26,-2557.48 h60
  text "GENERATED    :" at 405.74,-2557.48 h60
  text ".Print_Date" at 1275.24,-2557.48 h60
  text ".Print_Time" at 2004.24,-2557.48 h60
  text "TEXAS INSTRUMENTS" at 3268.74,-2557.48 h60
M12 Stackup:
  drawing of 212 lines, arcs and shapes, not listed
  text "NOTE :" at 5742.51,5800.49 h60
  text "1. THIS IS AN IMPEDANCE CONTROLLED BOARD." at 5926.02,5695.46 h60
  text "2. EXTERNAL LAYER CU THICKNESSES ARE FINISHED THICKNESS AFTER PLATING." at 5926.02,5597.59 h60
  text "6" at 7810.15,5434.9 h60
  text "IMPEDANCE TABLE :" at 6653.76,5419.52 h80
  text "LAYER" at 6152.01,5310.17 h70
  text "TRACE WIDTH" at 6439.21,5309.32 h70
  text "SPACING" at 6924.21,5309.32 h70
  text "IMPEDANCE +/- 10%" at 7259.21,5309.32 h70
  text "REFERENCE LAYER" at 7984.21,5309.32 h70
  text "TOP" at 6219.09,5151.18 h70
  text "4.5 MIL" at 6504.09,5146.18 h65
  text "4.5 MIL" at 6959.09,5146.18 h65
  text "90 OHM" at 7379.09,5146.18 h65
  text "LAYER-2 (GND PLANE)" at 7944.09,5146.18 h65
  text "LAYER STACK-UP :" at 3295.72,720.87 h80
  text "Layer" at 3010.53,463.49 h60
  text "Name" at 3420.45,463.49 h60
  text "Material" at 4350.19,463.49 h60
  text "Thickness" at 5909.73,463.49 h60
  text "Constant" at 6559.57,463.49 h60
  text "Board Layer Stack" at 7129.43,463.49 h60
  text "Top Overlay" at 3420.45,343.49 h60
  text "Top Solder" at 3420.45,223.49 h60
  text "Solder Resist" at 4350.19,223.49 h60
  text "0.40mil" at 5909.73,223.49 h60
  text "4.5" at 6559.57,223.49 h60
  text "1" at 3010.53,103.49 h60
  text "Top Layer" at 3420.45,103.49 h60
  text "1.40mil" at 5909.73,103.49 h60
  text "Dielectric 1" at 3420.45,-16.51 h60
  text "FR-4 High Tg135 (KB-6164)" at 4350.19,-16.51 h60
  text "41.93mil" at 5909.73,-16.51 h60
  text "4.5" at 6559.57,-16.51 h60
  text "2" at 3010.53,-136.51 h60
  text "Bottom Layer" at 3420.45,-136.51 h60
  text "1.40mil" at 5909.73,-136.51 h60
  text "Bottom Solder" at 3420.45,-256.51 h60
  text "Solder Resist" at 4350.19,-256.51 h60
  text "0.40mil" at 5909.73,-256.51 h60
  text "4.5" at 6559.57,-256.51 h60
  text "Bottom Overlay" at 3420.45,-376.51 h60
  text ".Layer_Name" at -1267.26,-2351.64 h60
M13 Component Bodies Top:
  text ".Layer_Name" at -1267.26,-2351.64 h60
M14 Component Bodies Bottom:
  text ".Layer_Name" at -1267.26,-2351.64 h60
M15 Courtyards Top:
  text ".Layer_Name" at -1267.26,-2351.64 h60
M16 Courtyards Bottom:
  text ".Layer_Name" at -1267.26,-2351.64 h60
Drill Drawing:
  circle w10: c-1639.6,4789.77 r33.33
  lines w10: -1672.94,4006.44 -1672.94,4023.11 -1656.27,4039.77 -1672.94,4056.44 -1672.94,4073.11 -1656.27,4073.11 -1639.6,4056.44 -1622.94,4073.11 -1606.27,4073.11 -1606.27,4056.44 -1622.94,4039.77 -1606.27,4023.11 -1606.27,4006.44 -1622.94,4006.44 -1639.6,4023.11 -1656.27,4006.44 -1672.94,4006.44 ; -1672.94,4156.44 -1606.27,4156.44 -1606.27,4223.11 -1672.94,4223.11 -1672.94,4156.44 ; -1672.94,4373.11 -1606.27,4373.11 -1639.6,4306.44 -1672.94,4373.11 ; -1672.94,4473.11 -1656.27,4473.11 -1639.6,4456.44 -1622.94,4473.11 -1606.27,4473.11 -1622.94,4489.77 -1606.27,4506.44 -1622.94,4506.44 -1639.6,4523.11 -1656.27,4506.44 -1672.94,4506.44 -1656.27,4489.77 -1672.94,4473.11 ; -1672.94,4639.77 -1639.6,4606.44 -1606.27,4639.77 -1639.6,4673.11 -1672.94,4639.77 ; -1672.94,4906.44 -1639.6,4923.11 -1606.27,4906.44 -1622.94,4939.77 -1606.27,4973.11 -1639.6,4956.44 -1672.94,4973.11 -1656.27,4939.77 -1672.94,4906.44 ; -1672.94,5056.44 -1606.27,5056.44 -1606.27,5123.11 -1672.94,5123.11 -1672.94,5056.44 ; -1659.6,4169.77 -1619.6,4169.77 -1619.6,4209.77 -1659.6,4209.77 -1659.6,4169.77
  lines w15: -1732.73,3961.44 4825.44,3961.44 ; -1732.73,5161.44 4825.44,5161.44 ; -1181.85,3811.44 -1181.85,5311.44 ; -582.01,3811.44 -582.01,5311.44 ; 537.66,3811.44 537.66,5311.44 ; 1043.54,3811.44 1043.54,5311.44 ; 2377.15,3811.44 2377.15,5311.44 ; 3710.75,3811.44 3710.75,5311.44 ; -1732.73,3811.44 4825.44,3811.44 4825.44,5311.44 -1732.73,5311.44 -1732.73,3811.44
  text "Symbol" at -1642.73,5206.44 h72
  text "Count" at -1136.85,5206.44 h72
  text "Hole Size" at -537.01,5206.44 h72
  text "Plated" at 582.66,5206.44 h72
  text "Hole Tolerance (+)" at 1088.54,5206.44 h72
  text "Hole Tolerance (-)" at 2422.15,5206.44 h72
  text "Hole Length" at 3755.75,5206.44 h72
  text "2" at -1136.85,5056.44 h60
  text "23.62mil (0.600mm)" at -537.01,5056.44 h60
  text "PTH" at 582.66,5056.44 h60
  text "51.18mil (1.300mm)" at 3755.75,5056.44 h60
  text "2" at -1136.85,4906.44 h60
  text "33.47mil (0.850mm)" at -537.01,4906.44 h60
  text "NPTH" at 582.66,4906.44 h60
  text "-" at 3755.75,4906.44 h60
  text "2" at -1136.85,4756.44 h60
  text "33.47mil (0.850mm)" at -537.01,4756.44 h60
  text "PTH" at 582.66,4756.44 h60
  text "-" at 3755.75,4756.44 h60
  text "3" at -1136.85,4606.44 h60
  text "118.11mil (3.000mm)" at -537.01,4606.44 h60
  text "PTH" at 582.66,4606.44 h60
  text "-" at 3755.75,4606.44 h60
  text "24" at -1136.85,4456.44 h60
  text "27.56mil (0.700mm)" at -537.01,4456.44 h60
  text "PTH" at 582.66,4456.44 h60
  text "-" at 3755.75,4456.44 h60
  text "26" at -1136.85,4306.44 h60
  text "40.00mil (1.016mm)" at -537.01,4306.44 h60
  text "PTH" at 582.66,4306.44 h60
  text "-" at 3755.75,4306.44 h60
  text "82" at -1136.85,4156.44 h60
  text "8.00mil (0.203mm)" at -537.01,4156.44 h60
  text "PTH" at 582.66,4156.44 h60
  text "-" at 3755.75,4156.44 h60
  text "288" at -1136.85,4006.44 h60
  text "8.00mil (0.203mm)" at -537.01,4006.44 h60
  text "PTH" at 582.66,4006.44 h60
  text "3.00mil (0.076mm)" at 1088.54,4006.44 h60
  text "3.00mil (0.076mm)" at 2422.15,4006.44 h60
  text "-" at 3755.75,4006.44 h60
  text "429 Total" at -1136.85,3856.44 h60
  text "Slot definitions :" at -1642.73,3711.47 h60
  text "Routed Path Length" at -610.04,3711.47 h60
  text "= Calculated from tool start centre position to tool end centre position." at 492.63,3711.47 h60
  text "Hole Length" at -610.04,3611.49 h60
  text "= Routed Path Length + Tool Size = Slot length as defined in the PCB layout" at 82.76,3611.49 h60
  text ".Layer_Name" at -1267.26,-2351.64 h60
M17 Embedded Cavity:
  text ".Layer_Name" at -1267.26,-2351.64 h60
M18 Embedded Assembly:
  text ".Layer_Name" at -1252.74,-2340.54 h60
M19 Embedded Keepout:
  text ".Layer_Name" at -1164.78,-2348.54 h60
Radome cover:
  lines w0.5: 1351,340.08 1388.5,340.08 ; 1351,340.08 1351,342.58 ; 1351,340.08 1388.5,340.08 ; 1351,340.08 1351,342.58 ; 1351,342.58 1352,342.58 ; 1351,342.58 1352,342.58 ; 1351,342.58 1351,377.58 ; 1351,342.58 1352,342.58 ; 1351,342.58 1352,342.58 ; 1351,342.58 1351,377.58 ; 1351,377.58 1352,377.58 ; 1351,377.58 1352,377.58 ; 1351,377.58 1351,381.08 ; 1351,377.58 1352,377.58 ; 1351,377.58 1352,377.58 ; 1351,377.58 1351,381.08 ; 1351,381.08 1388.5,381.08 ; 1351,381.08 1388.5,381.08 ; 1352,342.58 ccw(c1353.5,342.58) 1355,342.58 ; 1352,342.58 cw(c1353.5,342.58) 1354.56,343.64 ; 1352,342.58 ccw(c1353.5,342.58) 1355,342.58 ; 1352,342.58 cw(c1353.5,342.58) 1354.56,343.64 ; 1352,377.58 ccw(c1353.5,377.58) 1355,377.58 ; 1352,377.58 cw(c1353.5,377.58) 1355,377.58 ; 1352,377.58 ccw(c1353.5,377.58) 1355,377.58 ; 1352,377.58 cw(c1353.5,377.58) 1355,377.58 ; 1354.56,343.64 cw(c1353.5,342.58) 1355,342.58 ; 1354.56,343.64 cw(c1353.5,342.58) 1355,342.58 ; 1354.56,343.64 1356,345.08 ; 1354.56,343.64 1356,345.08 ; 1354.56,343.64 1356,345.08 ; 1354.56,343.64 1356,345.08 ; 1356,345.08 1386,345.08 ; 1356,345.08 1356,375.08 ; 1356,345.08 1386,345.08 ; 1356,345.08 1356,375.08 ; 1356,375.08 1386,375.08 ; 1356,375.08 1386,375.08 ; 1386,345.08 1386,375.08 ; 1386,345.08 1386,375.08 ; 1388.5,340.08 1392,340.08 ; 1388.5,340.08 1388.5,341.08 ; 1388.5,340.08 1388.5,341.08 ; 1388.5,340.08 1392,340.08 ; 1388.5,340.08 1388.5,341.08 ; 1388.5,340.08 1388.5,341.08 ; 1388.5,341.08 ccw(c1388.5,342.58) 1390,342.58 ; 1388.5,341.08 cw(c1388.5,342.58) 1390,342.58 ; 1388.5,341.08 ccw(c1388.5,342.58) 1390,342.58 ; 1388.5,341.08 cw(c1388.5,342.58) 1390,342.58 ; 1388.5,379.08 ccw(c1388.5,377.58) 1390,377.58 ; 1388.5,379.08 cw(c1388.5,377.58) 1390,377.58 ; 1388.5,379.08 ccw(c1388.5,377.58) 1390,377.58 ; 1388.5,379.08 cw(c1388.5,377.58) 1390,377.58 ; 1388.5,379.08 1388.5,381.08 ; 1388.5,379.08 1388.5,381.08 ; 1388.5,379.08 1388.5,381.08 ; 1388.5,379.08 1388.5,381.08 ; 1388.5,381.08 1392,381.08 ; 1388.5,381.08 1392,381.08 ; 1392,340.08 1392,381.08 ; 1392,340.08 1392,381.08

## Text inside footprints (layer, text, board x,y; h text height)
ZZ1: M5 Assembly Top "Install label in silkscreened box after final wash.  Text shall be 8 pt font.  Text shall be per the Label Table in the PDF schematic." at -1657.57,3074.58 h40